# EAGLE board GB ARDUINO SHEILD (EAGLE 9.5.2)
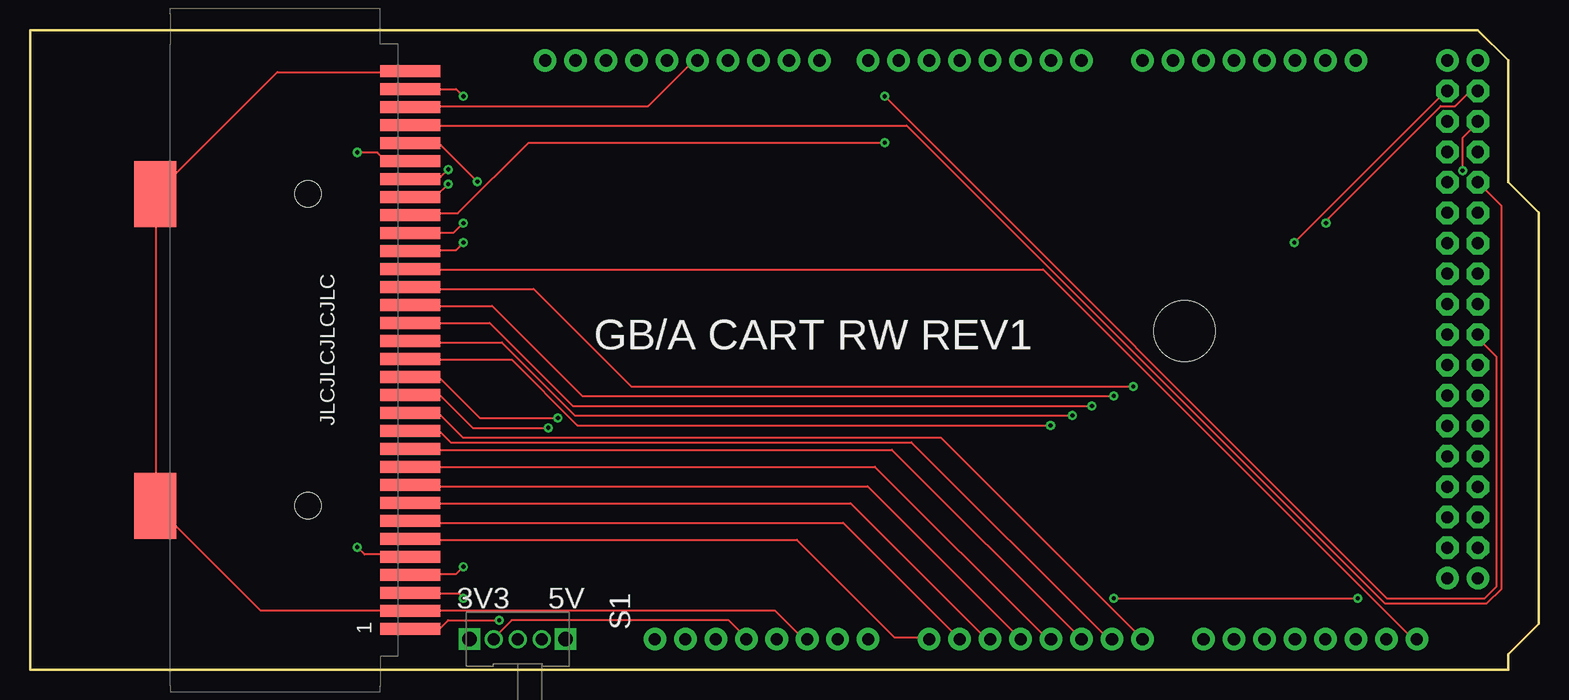
[diagram p0: board, top side]
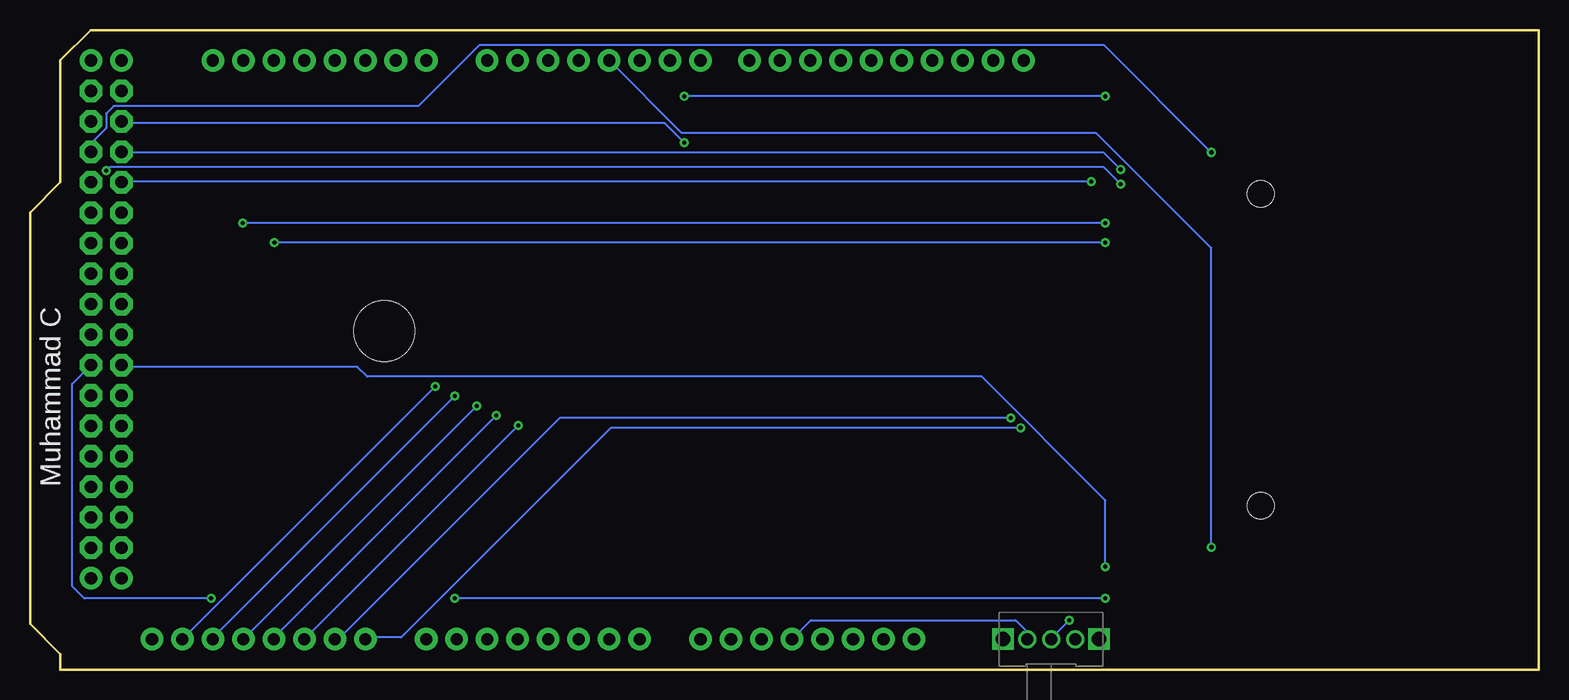
[diagram p1: board, bottom side, seen from below]

Size 125.73 x 53.34 mm. Coordinates in mm from the lower left corner, seen from the top.
Copper layers (1*16): Top 0.035mm / dielectric 1.5mm / Bottom 0.035mm
Design rules "default *": minimum track width 6mil, minimum drill 0.35mm, track to track 10mil, track to pad 10mil, pad to pad 6mil, via to via 10mil, smd to smd 6mil, copper to edge 40mil, drill to drill 6mil, minimum pad ring 10mil, minimum via ring 8mil, stop-mask expansion 4mil, vias tented up to drill 0mil, thermal gap 10mil

## Footprints (pad centres in the part's own frame; a part is rotated, then mirrored left to right if it is on the bottom)
ARDUINO_MEGA2560 = drill 1.016 pad 1.88: 0 63.5,50.8; 1 60.96,50.8; 2 58.42,50.8; 3 55.88,50.8; 3.3V 35.56,2.54; 4 53.34,50.8; 5 50.8,50.8; 5V 38.1,2.54; 5V. 93.98,50.8; 5V.. 96.52,50.8; 6 48.26,50.8; 7 45.72,50.8; 8 41.656,50.8; 9 39.116,50.8; 10 36.576,50.8; 11 34.036,50.8; 12 31.496,50.8; 13 28.956,50.8; 14 68.58,50.8; 15 71.12,50.8; 16 73.66,50.8; 17 76.2,50.8; 18 78.74,50.8; 19 81.28,50.8; 20 83.82,50.8; 21 86.36,50.8; A0 50.8,2.54; A1 53.34,2.54; A2 55.88,2.54; A3 58.42,2.54; A4 60.96,2.54; A5 63.5,2.54; A6 66.04,2.54; A7 68.58,2.54; A8 73.66,2.54; A9 76.2,2.54; A10 78.74,2.54; A11 81.28,2.54; A12 83.82,2.54; A13 86.36,2.54; A14 88.9,2.54; A15 91.44,2.54; AREF 23.876,50.8; GND 26.416,50.8; GND. 43.18,2.54; GND.. 40.64,2.54; GND... 93.98,7.62; GND.... 96.52,7.62; I/OREF 30.48,2.54; N/C 27.94,2.54; RESET 33.02,2.54; SCL1 18.796,50.8; SDA1 21.336,50.8; VIN 45.72,2.54 | drill 1.016 pad 1.88 octagon: 22 93.98,48.26; 23 96.52,48.26; 24 93.98,45.72; 25 96.52,45.72; 26 93.98,43.18; 27 96.52,43.18; 28 93.98,40.64; 29 96.52,40.64; 30 93.98,38.1; 31 96.52,38.1; 32 93.98,35.56; 33 96.52,35.56; 34 93.98,33.02; 35 96.52,33.02; 36 93.98,30.48; 37 96.52,30.48; 38 93.98,27.94; 39 96.52,27.94; 40 93.98,25.4; 41 96.52,25.4; 42 93.98,22.86; 43 96.52,22.86; 44 93.98,20.32; 45 96.52,20.32; 46 93.98,17.78; 47 96.52,17.78; 48 93.98,15.24; 49 96.52,15.24; 50 93.98,12.7; 51 96.52,12.7; 52 93.98,10.16; 53 96.52,10.16 | hole 5.08: 72.08,28.24
SWITCH-SPDT-2MM = drill 1: 1 0,2; 2 0,0; 3 0,-2 | drill 1.2 square: P$1 0,4; P$2 0,-4
GBA-SLOT-B = smd 5 x 1: 1 -5,23.25; 2 -5,21.75; 3 -5,20.25; 4 -5,18.75; 5 -5,17.25; 6 -5,15.75; 7 -5,14.25; 8 -5,12.75; 9 -5,11.25; 10 -5,9.75; 11 -5,8.25; 12 -5,6.75; 13 -5,5.25; 14 -5,3.75; 15 -5,2.25; 16 -5,0.75; 17 -5,-0.75; 18 -5,-2.25; 19 -5,-3.75; 20 -5,-5.25; 21 -5,-6.75; 22 -5,-8.25; 23 -5,-9.75; 24 -5,-11.25; 25 -5,-12.75; 26 -5,-14.25; 27 -5,-15.75; 28 -5,-17.25; 29 -5,-18.75; 30 -5,-20.25; 31 -5,-21.75; 32 -5,-23.25 | smd 3.5 x 5.5: SHIELD_3 16.25,13; SHIELD_4 16.25,-13 | hole 2.2: 3.5,13; 3.5,-13

## Placement (x,y rotation side)
PCB1  ARDUINO_MEGA2560SHIELD  [ARDUINO_MEGA2560]  24.13,0 0 top
S1  [SWITCH-SPDT-2MM]  40.64,2.54 270 top
SLOT  GBA-SLOT-BSMD  [GBA-SLOT-B]  26.67,26.67 180 top

## Library data of the parts
PCB1 = E14_Arduino_revC
S1 = cartreader; PROD_ID: SWCH-08261
SLOT = cartreader

## Nets
GND: PCB1.GND.. SLOT.2 SLOT.32 SLOT.SHIELD_3 SLOT.SHIELD_4
N$1: PCB1.41 SLOT.3
N$2: PCB1.40 SLOT.4
N$3: PCB1.4 SLOT.5
N$4: PCB1.A0 SLOT.6
N$5: PCB1.A1 SLOT.7
N$6: PCB1.A2 SLOT.8
N$7: PCB1.A3 SLOT.9
N$8: PCB1.A4 SLOT.10
N$9: PCB1.A5 SLOT.11
N$10: PCB1.A6 SLOT.12
N$11: PCB1.A7 SLOT.13
N$12: PCB1.A8 SLOT.14
N$13: PCB1.A9 SLOT.15
N$14: PCB1.A10 SLOT.16
N$15: PCB1.A11 SLOT.17
N$16: PCB1.A12 SLOT.18
N$17: PCB1.A13 SLOT.19
N$18: PCB1.A14 SLOT.20
N$19: PCB1.A15 SLOT.21
N$20: PCB1.22 SLOT.22
N$21: PCB1.23 SLOT.23
N$23: PCB1.24 SLOT.24
N$24: PCB1.25 SLOT.25
N$25: PCB1.26 SLOT.26
N$26: PCB1.27 SLOT.27
N$27: PCB1.28 SLOT.28
N$28: PCB1.29 SLOT.29
N$29: PCB1.12 SLOT.30
N$30: PCB1.39 SLOT.31
N$31: PCB1.5V S1.1
N$32: PCB1.3.3V S1.3
VCC: S1.2 SLOT.1

## Tracks (layer width: path | path; a pad name or v marks a point on that pad's centre or on a via)
GND
  Top 0.152: PCB1.GND.. 64.72,2.69 64.31,2.69 62.08,4.93 31.8,4.93 SLOT.2 31.6,4.93 19.2,4.93 10.46,13.67 SLOT.SHIELD_3 10.46,13.87 10.46,39.47 SLOT.SHIELD_4 10.46,39.67 20.62,49.84 31.6,49.84 SLOT.32
N$1  (via drill 0.35)
  Top 0.152: v90.32,5.94 v110.64,5.94 | v36.12,5.94 35.71,6.35 31.8,6.35 SLOT.3
  Bottom 0.152: PCB1.41 122.22,23.83 122.22,6.96 121.21,5.94 v110.64,5.94 | v36.12,5.94 v90.32,5.94
N$2  (via drill 0.35)
  Top 0.152: v36.12,8.59 35.51,7.98 31.8,7.98 SLOT.4
  Bottom 0.152: v36.12,8.59 36.12,14.12 46.43,24.44 97.64,24.44 98.45,25.25 117.96,25.25 PCB1.40
N$3  (via drill 0.35)
  Top 0.152: v27.28,10.21 27.89,9.6 31.6,9.6 SLOT.5
  Bottom 0.152: PCB1.4 71.42,44.75 36.88,44.75 27.28,35.15 v27.28,10.21
N$4
  Top 0.152: PCB1.A0 74.88,2.69 72.03,2.69 63.91,10.82 31.8,10.82 SLOT.6
N$5
  Top 0.152: PCB1.A1 67.77,12.24 31.8,12.24 SLOT.7
N$6
  Top 0.152: PCB1.A2 79.96,2.69 79.55,2.69 68.38,13.87 31.8,13.87 SLOT.8
N$7
  Top 0.152: PCB1.A3 69.8,15.29 31.8,15.29 SLOT.9
N$8
  Top 0.152: PCB1.A4 85.04,2.69 84.63,2.69 70.41,16.92 31.8,16.92 SLOT.10
N$9
  Top 0.152: PCB1.A5 71.83,18.34 31.8,18.34 SLOT.11
N$10
  Top 0.152: PCB1.A6 90.12,2.69 89.71,2.69 73.46,18.95 35.05,18.95 34.24,19.76 31.8,19.76 SLOT.12
N$11
  Top 0.152: PCB1.A7 75.89,19.36 36.07,19.36 34.04,21.39 31.8,21.39 SLOT.13
N$12  (via drill 0.35)
  Top 0.152: v43.18,20.17 36.88,20.17 34.24,22.81 31.8,22.81 SLOT.14
  Bottom 0.152: v43.18,20.17 77.32,20.17 94.79,2.69 97.64,2.69 PCB1.A8
N$13  (via drill 0.35)
  Top 0.152: v43.99,20.98 37.49,20.98 34.24,24.23 31.8,24.23 SLOT.15
  Bottom 0.152: v43.99,20.98 81.58,20.98 99.87,2.69 100.28,2.69 PCB1.A9
N$14  (via drill 0.35)
  Top 0.152: v85.04,20.37 45.62,20.37 40.13,25.86 31.8,25.86 SLOT.16
  Bottom 0.152: v85.04,20.37 PCB1.A10
N$15  (via drill 0.35)
  Top 0.152: v86.87,21.18 45.41,21.18 39.32,27.28 31.8,27.28 SLOT.17
  Bottom 0.152: v86.87,21.18 105.36,2.69 PCB1.A11
N$16  (via drill 0.35)
  Top 0.152: v88.49,22 45.21,22 38.3,28.91 31.8,28.91 SLOT.18
  Bottom 0.152: v88.49,22 PCB1.A12
N$17  (via drill 0.35)
  Top 0.152: v90.32,22.81 46.02,22.81 38.51,30.33 31.8,30.33 SLOT.19
  Bottom 0.152: v90.32,22.81 110.44,2.69 PCB1.A13
N$18  (via drill 0.35)
  Top 0.152: v91.95,23.62 50.09,23.62 41.96,31.75 31.8,31.75 SLOT.20
  Bottom 0.152: v91.95,23.62 PCB1.A14
N$19
  Top 0.152: PCB1.A15 115.52,2.69 115.11,2.69 84.43,33.38 31.8,33.38 SLOT.21
N$20  (via drill 0.35)
  Top 0.152: v105.36,35.61 117.96,48.21 PCB1.22 | v36.12,35.61 35.51,35 31.8,35 SLOT.22
  Bottom 0.152: v36.12,35.61 v105.36,35.61
N$21  (via drill 0.35)
  Top 0.152: v108,37.24 108,37.44 117.55,46.99 118.77,46.99 119.99,48.21 120.6,48.21 PCB1.23 | v36.12,37.24 35.31,36.42 31.8,36.42 SLOT.23
  Bottom 0.152: v36.12,37.24 v108,37.24
N$23  (via drill 0.35)
  Top 0.152: v71.22,43.94 41.55,43.94 35.66,38.05 31.8,38.05 SLOT.24
  Bottom 0.152: v71.22,43.94 72.85,45.57 117.96,45.57 PCB1.24
N$24  (via drill 0.35)
  Top 0.152: v119.38,41.61 119.38,44.35 120.6,45.57 PCB1.25 | v34.85,40.49 33.83,39.47 31.8,39.47 SLOT.25
  Bottom 0.152: v119.38,41.61 119.07,41.91 36.27,41.91 v34.85,40.49
N$25  (via drill 0.35)
  Top 0.152: v34.85,41.71 34.24,41.1 31.8,41.1 SLOT.26
  Bottom 0.152: v34.85,41.71 36.27,43.13 117.96,43.13 PCB1.26
N$26  (via drill 0.35)
  Top 0.152: v27.28,43.13 28.96,43.13 29.57,42.52 31.6,42.52 SLOT.27
  Bottom 0.152: v27.28,43.13 36.22,52.07 88.29,52.07 93.37,46.99 118.77,46.99 119.38,46.38 119.38,45.16 120.6,43.94 120.6,43.33 PCB1.27
N$27  (via drill 0.35)
  Top 0.152: v37.29,40.69 34.24,43.74 31.8,43.74 SLOT.28
  Bottom 0.152: v37.29,40.69 117.96,40.69 PCB1.28
N$28
  Top 0.152: PCB1.29 122.63,38.66 122.63,6.76 121.41,5.54 112.88,5.54 73.05,45.36 31.8,45.36 SLOT.29
N$29
  Top 0.152: PCB1.12 55.57,50.65 55.17,50.65 51.51,46.99 31.8,46.99 SLOT.30
N$30  (via drill 0.35)
  Top 0.152: v71.22,47.8 113.08,5.94 121.21,5.94 122.22,6.96 122.22,26.06 120.8,27.48 120.8,27.89 PCB1.39 | v36.12,47.8 35.51,48.41 31.8,48.41 SLOT.31
  Bottom 0.152: v36.12,47.8 v71.22,47.8
N$31
  Bottom 0.152: PCB1.5V 60.65,4.12 43.59,4.12 42.77,3.3 42.77,2.69 S1.1
N$32
  Top 0.152: S1.3 38.71,2.69 40.13,4.12 58.22,4.12 59.64,2.69 PCB1.3.3V
VCC  (via drill 0.35)
  Top 0.152: v39.12,4.12 34.85,4.12 34.24,3.51 31.8,3.51 SLOT.1
  Bottom 0.152: v39.12,4.12 40.54,2.69 S1.2

## Text on the board
tPlace: 3V3 | 5V